# Altium PCB Remote_control_PCB.PcbDoc
Units mm, origin at the board's own origin, x right, y up, seen from the top; angles counter-clockwise.
Board outline 59 x 37 mm, 4 copper layers (Top Layer, GND, +3.3V, Bottom Layer), stack 0.603 mm thick; 50 components, 59 nets, 198 pads, 295 vias.
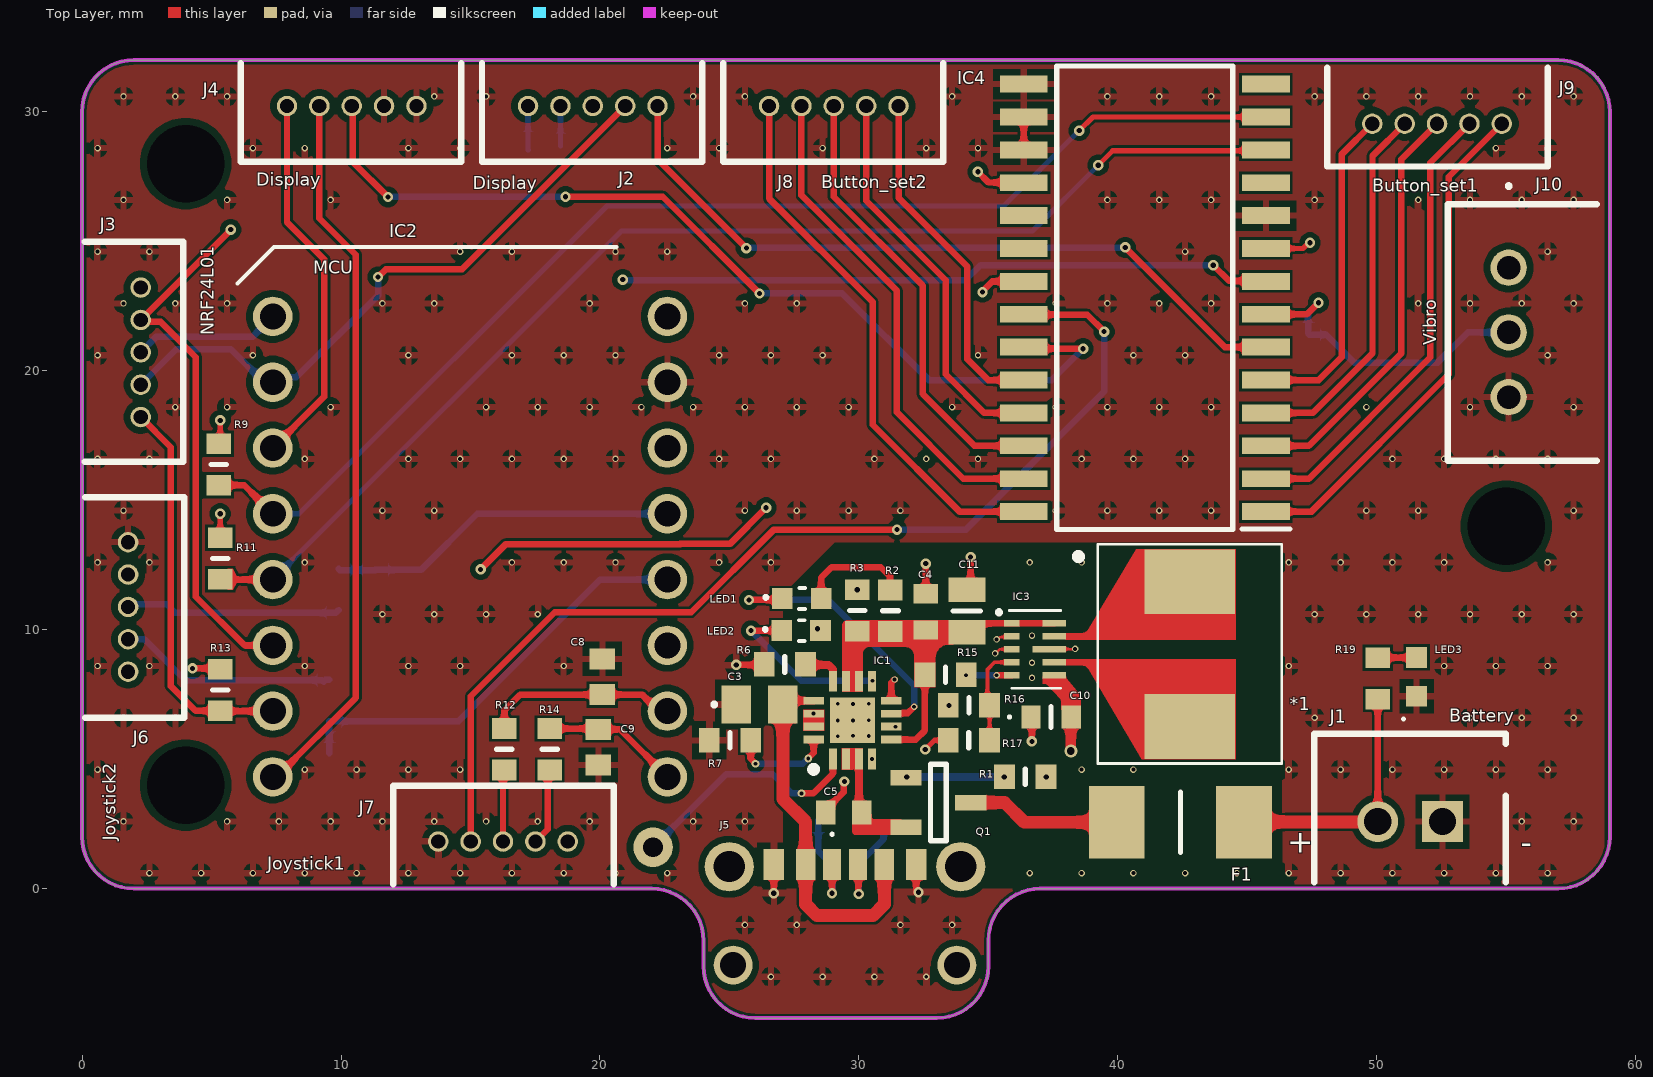
[diagram p0: Top Layer view]
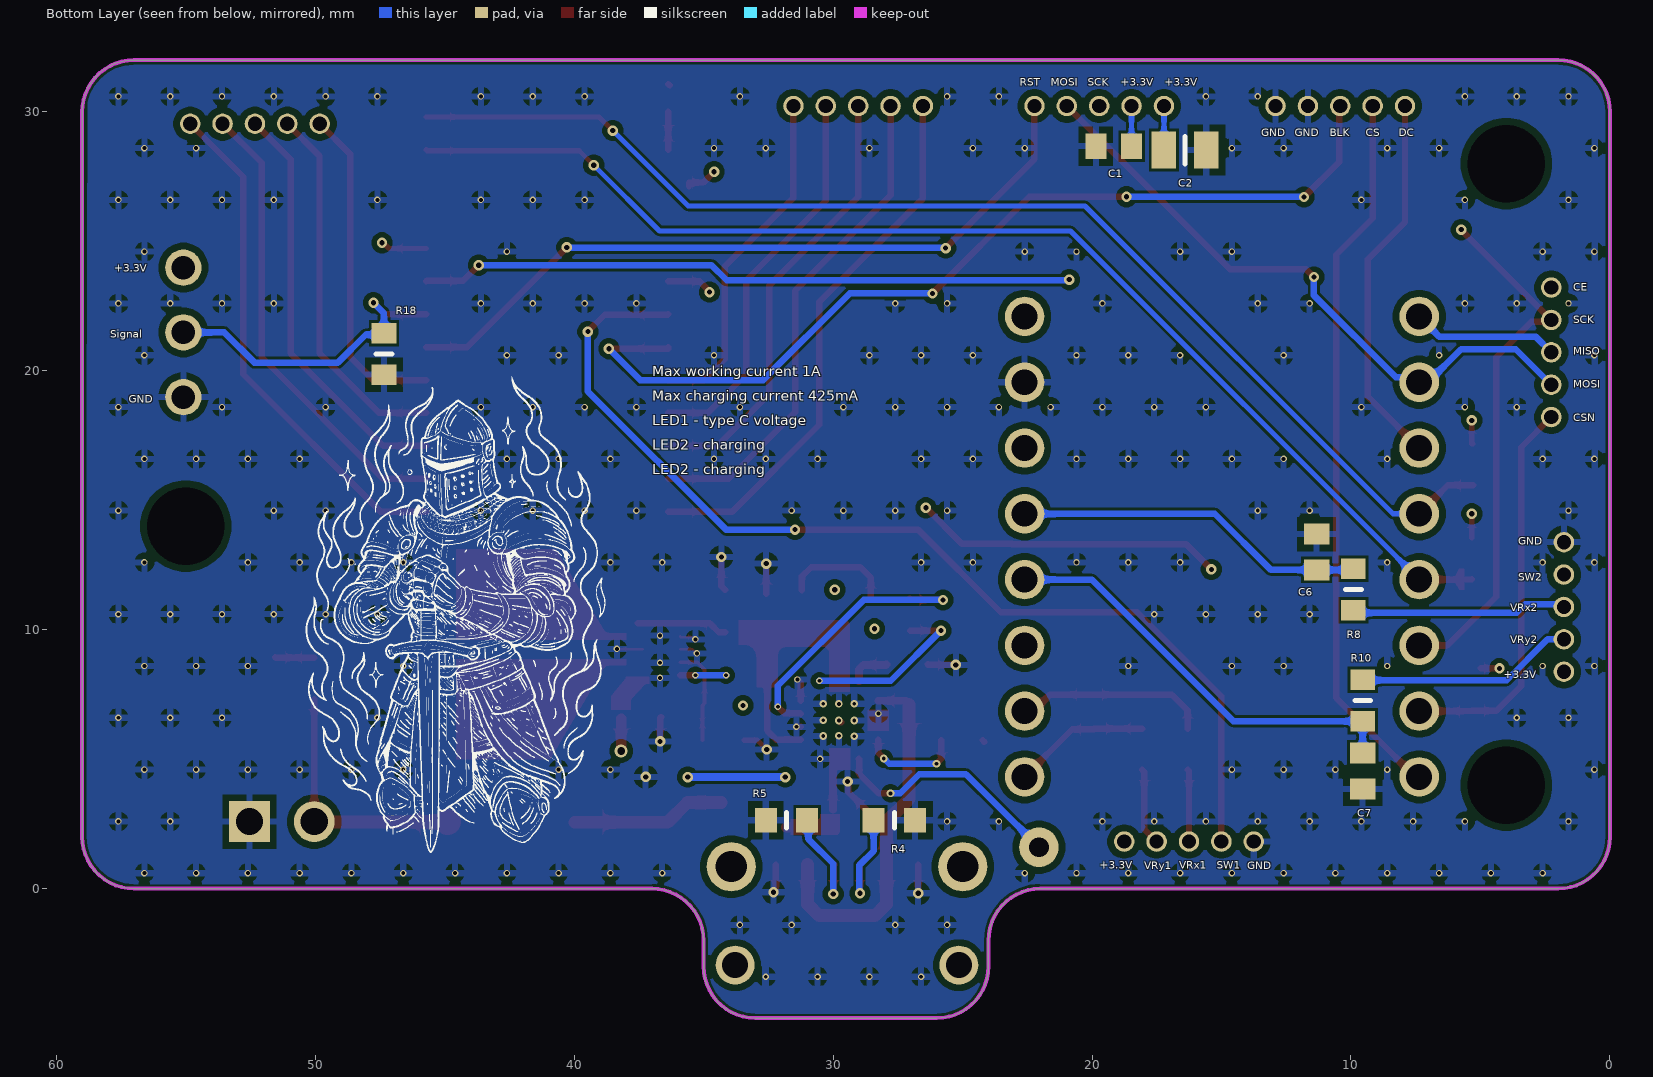
[diagram p1: Bottom Layer view, seen from below]
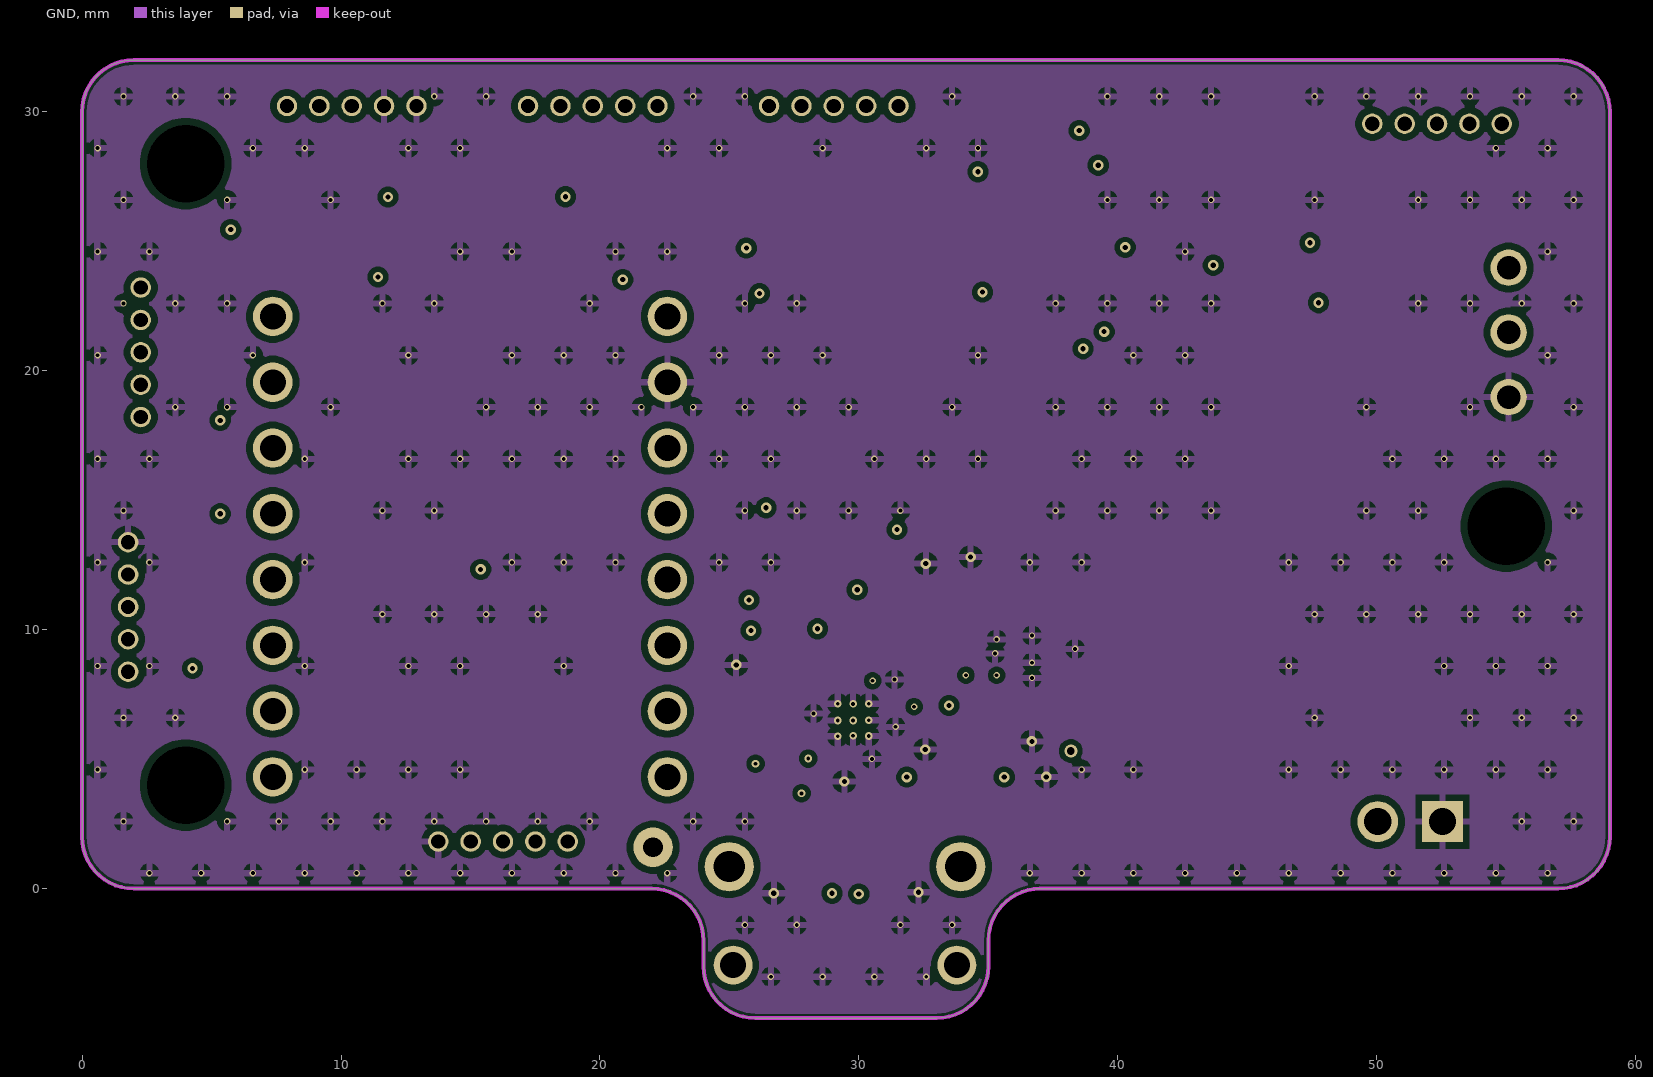
[diagram p2: GND]
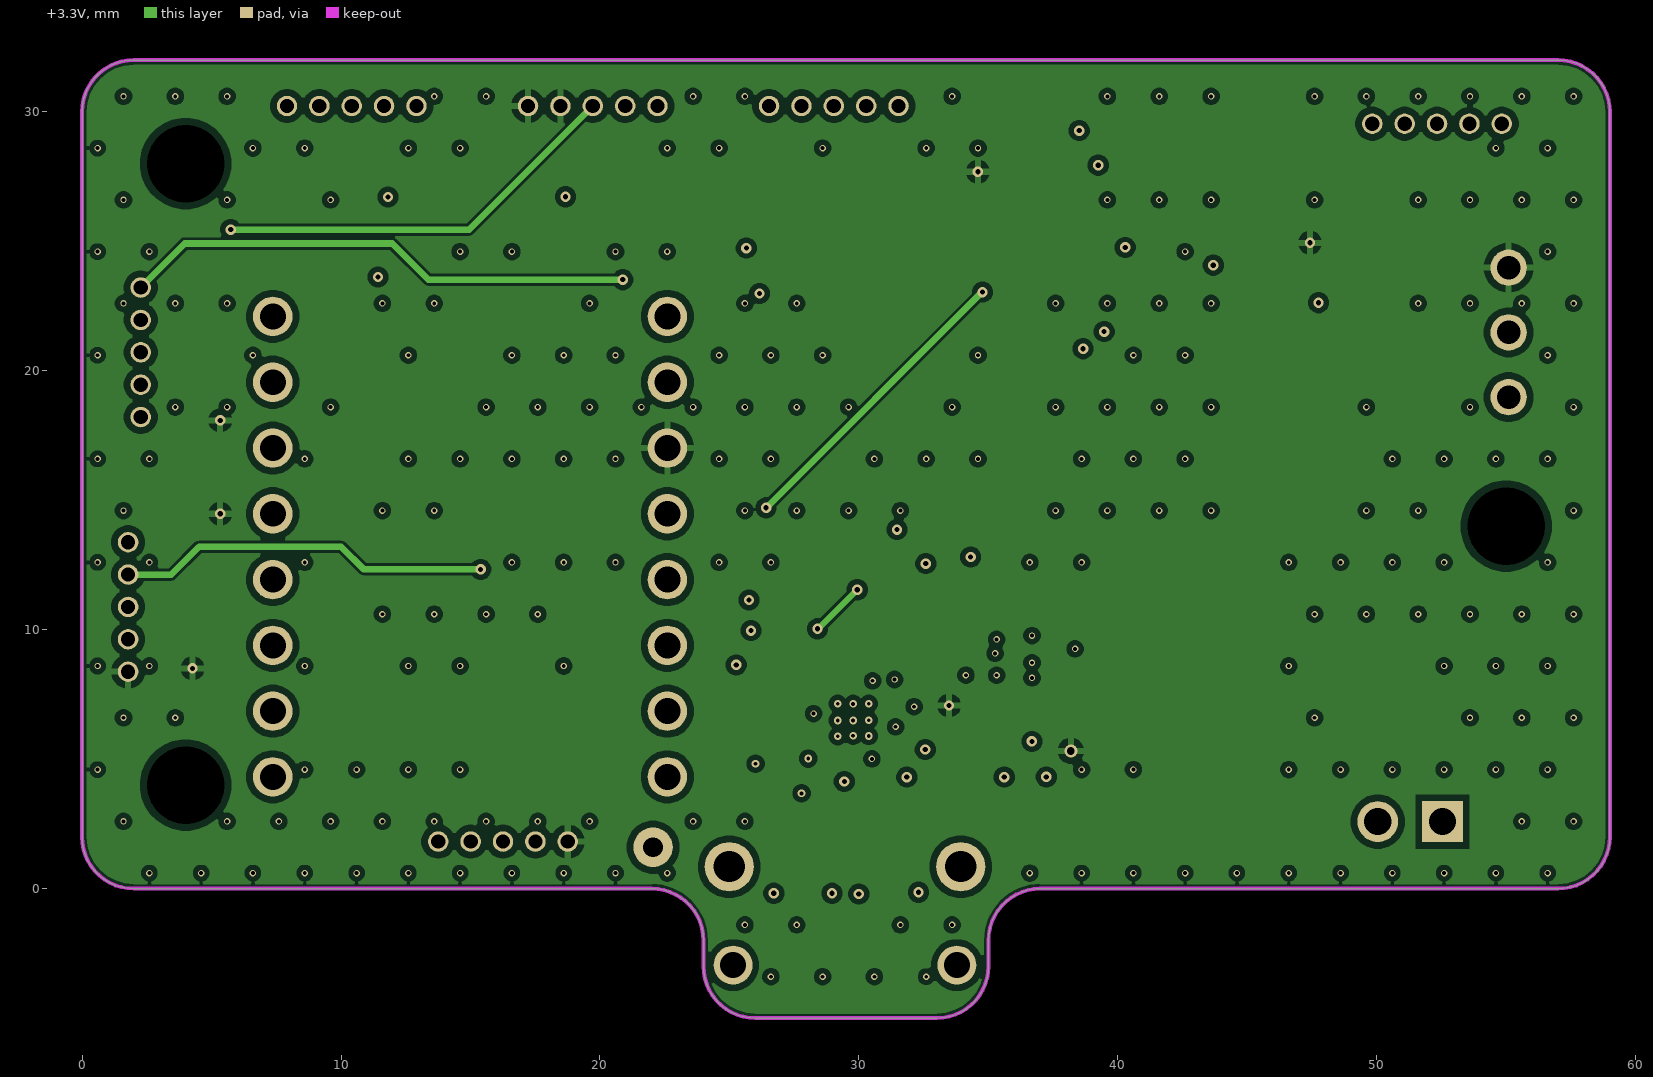
[diagram p3: +3.3V]
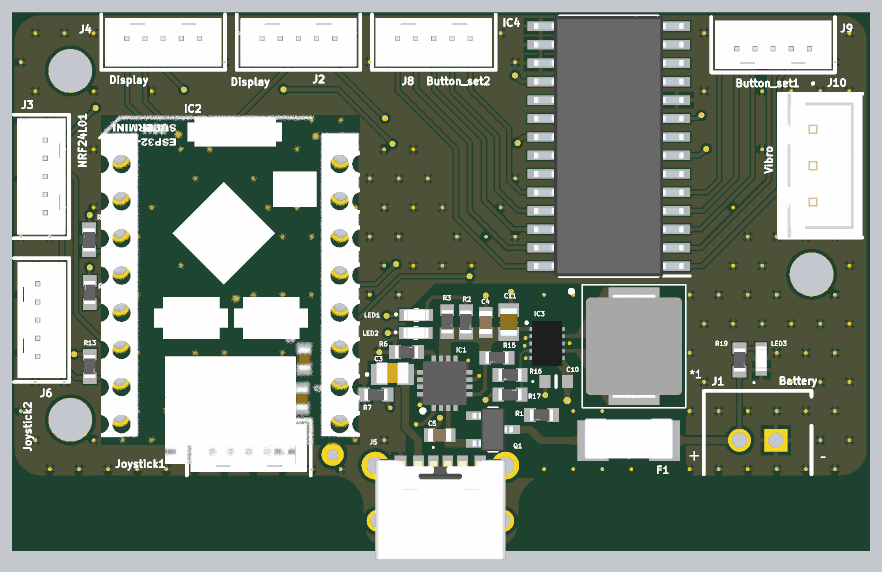
[diagram p4: 3D render of the assembled board from above, using the file's embedded part models]
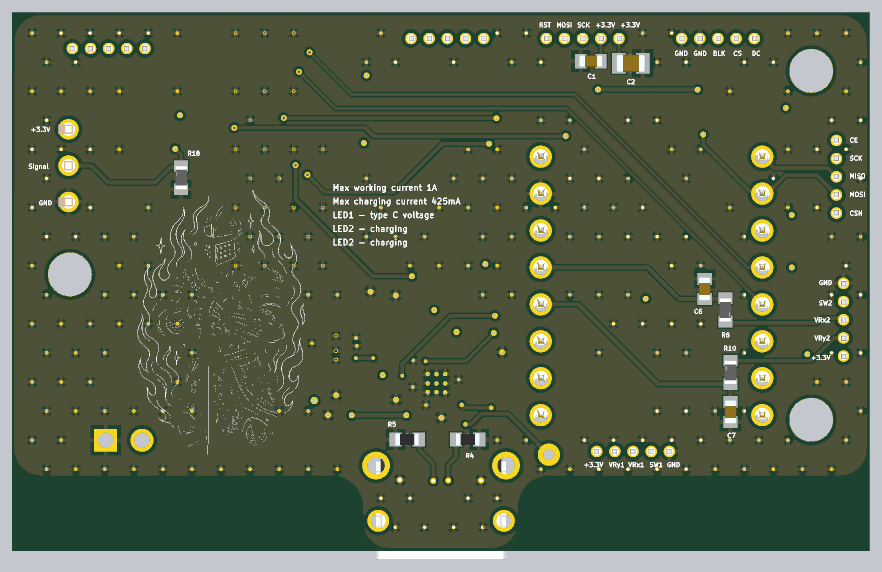
[diagram p5: 3D render of the assembled board from below, using the file's embedded part models]

## Layer stack, top to bottom
Top Solder: solder mask 0.0102, Solder Resist, Dk 3.5
Top Layer: signal copper 0.0356
Dielectric 2: prepreg 0.0711, PP-006, Dk 4.1
GND: signal copper 0.035
Dielectric 1: dielectric 0.32, FR-4, Dk 4.8
+3.3V: signal copper 0.035
Dielectric 3: prepreg 0.0711, PP-006, Dk 4.1
Bottom Layer: signal copper 0.0356
Bottom Solder: solder mask 0.0102, Solder Resist, Dk 3.5

## Board outline
24,-3 24,-2 ccw(c22,-2) 22,0 2,0 cw(c2,2) 0,2 0,30 cw(c2,30) 2,32 57,32 cw(c57,30) 59,30 59.004,29.997 59.004,2.007 59,2 cw(c57,2) 57,0 37,0 ccw(c37,-2) 35,-2 35,-3 cw(c33,-3) 33,-5 26,-5 cw(c26,-3)

## Design rules (kind name [scope] priority, off if disabled: settings)
Clearance "Stitching GND" [IsStitchingVia and InNet('GND') vs (IsVia and (Not IsStitchingVia)) Or IsPad] p1: gap=0.1 ignorepadtopadclearanceinfootprint=TRUE
Clearance "Stitching GND_1" [IsStitchingVia and InNet('GND') vs (IsVia and (Not IsStitchingVia)) Or IsPad] p2: gap=0.25 ignorepadtopadclearanceinfootprint=FALSE
Clearance [All] p3: gap=0.1 ignorepadtopadclearanceinfootprint=FALSE except(0.15: SMDPad-SMDPad; 0.2: Arc-Via Track-Via SMDPad-Hole Via-Via Via-Fill Via-Poly Via-Region; 0.254: Arc-Text Arc-Hole Track-Text Track-Hole SMDPad-Text THPad-Fill THPad-Poly THPad-Region THPad-Text THPad-Hole Via-Text Via-Hole Fill-Text Fill-Hole Poly-Text Poly-Hole Region-Text Region-Hole Text-Text Text-Hole; 0.28: Arc-THPad Track-THPad SMDPad-THPad; 0.3: THPad-Via; 0.45: THPad-THPad)
HoleSize [All] p1: absolutevalues=TRUE maxlimit=6.3 minlimit=0.15 maxpercent=80.000 minpercent=20.000
MinimumSolderMaskSliver [All] p1: minsoldermaskwidth=0.15
PolygonConnect [All] p1: connectstyle=Relief reliefconductorwidth=0.254 reliefentries=4 polygonreliefangle="90 Angle" airgapwidth=0.254
RoutingVias [InNet('GND')] p1: holewidth=0.711 width=1.27 viastyle="Through Hole" minholewidth=0.15 minwidth=0.25 maxholewidth=0.711 maxwidth=1.27
SilkToSilkClearance [All] p1: silktosilkclearance=0.15
SilkToSolderMaskClearance [IsPad] p1: minsilkscreentomaskgap=0.15 clearancetoexposedcopper=TRUE
SolderMaskExpansion [All] p1: expansion=0 istentingtop=FALSE
SupplyNets "Schematic Supply Nets_11" [InNet('GNDC')] p1: voltage=0.000
SupplyNets "Schematic Supply Nets_10" [InNet('VBUS_2')] p2: voltage=0.000
SupplyNets "Schematic Supply Nets_9" [InNet('VBUS_1')] p3: voltage=0.000
SupplyNets "Schematic Supply Nets_8" [InNet('Battery')] p4: voltage=0.000
SupplyNets "Schematic Supply Nets_7" [InNet('VRx2')] p5: voltage=0.000
SupplyNets "Schematic Supply Nets_6" [InNet('VRy2')] p6: voltage=0.000
SupplyNets "Schematic Supply Nets_5" [InNet('VRy1')] p7: voltage=0.000
SupplyNets "Schematic Supply Nets_4" [InNet('VRx1')] p8: voltage=0.000
SupplyNets "Schematic Supply Nets_1" [InNet('GND')] p9: voltage=0.000
SupplyNets "Schematic Supply Nets_3" [InNet('Thermistor')] p10: voltage=0.000
SupplyNets "Schematic Supply Nets_2" [InNet('+5V')] p11: voltage=0.000
SupplyNets "Schematic Supply Nets" [InNet('+3.3V')] p12: voltage=0.000
Width [All] p1: maxlimit=1 minlimit=0.1 preferedwidth=0.25 minimp=50.000000 maximp=50.000000 favimp=50.000000
26 further rules are at their usual default settings.

## Classes and differential pairs
component class U_Power_suply: *1 C10 C11 IC3 l1 R15 R16 R17
component class U_MCU: C6 C7 C8 C9 "ESP C3 SuperMini" IC2 J6 J7 R8 R9 R10 R11 R12 R13 R14
component class U_I2C_buttons: IC4 J8 J9 J10 R18
component class U_Charging: C3 C4 C5 IC1 J5 LED1 LED2 R2 R3 R4 R5 R6 R7
component class Gamepade_blocks: C1 C2 F1 J1 J2 J3 J4 LED3 Q1 R1 R19

## Components (designator, comment, footprint, x,y, rotation, side; value= is the part's Value field where it differs from the comment)
*1 "L" Coil 41.127,5.248 r0 top
C1 "100nF" CAPC1608X95N 19.162,28.676 r180 bottom
C2 "10uF" CAPC2012X140N 16.408,28.524 r0 bottom
C3 "1uF" C0805 26.162,7.112 r0 top
C4 "4.7uF" CAPC1608X90N 32.576,10.691 r270 top
C5 "4.7uF" CAPC1608X90N 29.413,2.94 r0 top
C6 "100nF" CAPC1608X95N 11.328,13.001 r270 bottom
C7 "100nF" CAPC1608X95N 9.55,4.542 r90 bottom
C8 "100nF" CAPC1608X95N 20.091,8.183 r270 top
C9 "100nF" CAPC1608X95N 19.939,5.465 r90 top
C10 "22uF" ZRB18x 37.42,6.63 r0 top
C11 "10uF" CAPC2012X140N 34.167,10.719 r270 top
F1 "1А" FUSC6125X279N 42.418,2.565 r0 top
IC1 "BQ24072RGTR" QFN50P300X300X100-17N-D 29.753,6.509 r90 top
IC2 "ESP C3 SuperMini" "esp c3 super mini" 7.366,4.318 r0 top
IC3 "TPS63802DLAR" TPS63802DLAR 36.8,9.244 r0 top
IC4 "MCP23017-E_SO" SOIC127P1030X265-28N 41.04,22.818 r180 top
J1 "Battery" Conector_2 46.569,-0.743 r0 top
J2 "Display" 1.25_JSH-GH_5 15.445,28.067 r0 top
J3 "NRF24L01" 1.25_JSH-GH_5 0.105,24.992 r270 top
J4 "Display" 1.25_JSH-GH_5 6.136,28.067 r0 top
J5 "USB4125-GF-A-0190" USB4125GFA0190 29.464,-2.15 r0 top
J6 "Joystick2" 1.25_JSH-GH_5 3.937,6.603 r90 top
J7 "Joystick1" 1.25_JSH-GH_5 20.534,3.979 r180 top
J8 "Button_set2" 1.25_JSH-GH_5 24.754,28.067 r0 top
J9 "Button_set1" 1.25_JSH-GH_5 56.605,31.7 r180 top
J10 "Vibro" B3BXHALFSN 55.093,23.983 r270 top
LED1 "LS_L29K-H1J2-1" SMT-0603 27.794,11.207 r0 top
LED2 "LS_L29K-H1J2-1" SMT-0603 27.768,9.967 r0 top
LED3 "LS_L29K-H1J2-1" SMT-0603 51.538,8.182 r90 top
Q1 "AO3401A" SOT95P280X125-3N 33.071,3.327 r0 top
R1 "100kR" RESC1608X55N 36.424,4.318 r180 top
R2 "1.5kR" RESC1608X55N 31.217,10.735 r270 top
R3 "1.5kR" RESC1608X55N 29.936,10.743 r270 top
R4 "5.1kR" RESC1608X60N 27.635,2.642 r0 bottom
R5 "5.1kR" RESC1608X60N 31.8,2.642 r180 bottom
R6 "1.5kR" RESC1608X55N 27.14,8.661 r0 top
R7 "2.1kR" RESC1608X55N 25.021,5.728 r0 top
R8 "1kR" RESC1608X55N 9.906,11.557 r270 bottom
R9 "4.7kR" RESC1608X55N 5.283,16.383 r90 top
R10 "1kR" RESC1608X55N 9.55,7.264 r90 bottom
R11 "4.7kR" RESC1608X55N 5.334,12.751 r90 top
R12 "1kR" RESC1608X55N 16.307,5.385 r270 top
R13 "10kR" RESC1608X55N 5.334,7.671 r270 top value=10kOhm
R14 "1kR" RESC1608X55N 18.059,5.385 r270 top
R15 "100kR" RESC1608X55N 33.351,8.26 r180 top
R16 "511kR" RESC1608X55N 34.247,7.081 r180 top
R17 "91kR" RESC1608X55N 34.246,5.73 r0 top
R18 "10kR" RESC1608X55N 47.346,20.65 r90 bottom value=10kOhm
R19 "1.5kR" RESC1608X55N 50.043,8.119 r270 top

## Footprints (in the part's own frame and the unit in brackets; to place one, negate y for a bottom-side part, rotate by r counter-clockwise, add the part's x,y. Pads: shape width x height; smd on the part's side, far side on the other; paste and mask are expansions set on the pad)
1.25_JSH-GH_5 [mm]
  round 0.79 hole 0.55: 1(1.778,2.159) 2(3.028,2.159) 3(4.278,2.159) 4(5.528,2.159) 5(6.778,2.159)
  silkscreen extent 0,0 8.51,3.81, body extent 0.25,0.24 8.25,3.57, height 4.22
B3BXHALFSN [mm]
  round 1.4 hole 0.9: 1(0,0) 2(2.5,0) 3(5,0)
  silkscreen extent -3.2,-2.35 7.45,3.4, body extent -2.45,-2.35 7.45,3.4, height 7.09
C0805 [mm]
  rect 1.15x1.45 smd: 1(-0.9,0) 2(0.9,0)
  silkscreen extent -1.8,-0.05 -1.7,0.05, body extent -1.1,-0.63 1.1,0.82, height 1
CAPC1608X90N [mm]
  rect 0.75x0.94 smd: 1(-0.7,0) 2(0.7,0)
  body extent -0.8,-0.45 0.8,0.45, height 0.8
CAPC1608X95N [mm]
  rect 0.81x0.99 smd: 1(-0.69,0) 2(0.69,0)
  body extent -0.81,-0.41 0.81,0.41, height 0.95
CAPC2012X140N [mm]
  rect 0.94x1.43 smd: 1(-0.82,0) 2(0.82,0)
  silkscreen extent 0,-0.53 0,0.53, body extent -1,-0.63 1,0.63, height 1.4
Coil [mm]
  rect 3.5x2.5 smd: 1(1.651,6.604) 2(1.651,1.016)
  silkscreen extent -1.91,-0.41 5.21,8.05, body extent -1.65,0.26 4.95,7.36, height 3
Conector_2 [mm]
  rect 1.575x1.575 hole 1.05: 1(5.969,3.334)
  round 1.575 hole 1.05: 2(3.469,3.334)
  silkscreen extent 1.02,0.98 8.42,6.73
"esp c3 super mini" [mil]
  round 60 hole 39.37: 0(0,700) 1(0,600) 2(0,500) 3(0,400) 4(0,300) 5(0,200) 6(0,100) 7(0,0) 8(600,700) 9(600,600) 10(600,500) 11(600,400) 12(600,300) 13(600,200) 14(600,100) 15(600,0)
  body extent -50,-132 652,812, height 524
FUSC6125X279N [mm]
  rect 2.15x2.8 smd: 1(-2.455,0) 2(2.455,0)
  silkscreen extent 0,-1.17 0,1.17, body extent -3.05,-1.27 3.05,1.52, height 2.27
QFN50P300X300X100-17N-D [mm]
  rect 0.8x0.3 smd: 1(-1.5,0.75) 2(-1.5,0.25) 3(-1.5,-0.25) 4(-1.5,-0.75) 9(1.5,-0.75) 10(1.5,-0.25) 11(1.5,0.25) 12(1.5,0.75)
  rect 0.3x0.8 smd: 5(-0.75,-1.5) 6(-0.25,-1.5) 7(0.25,-1.5) 8(0.75,-1.5) 13(0.75,1.5) 14(0.25,1.5) 15(-0.25,1.5) 16(-0.75,1.5)
  rect 1.75x1.75 smd: 17(0,0)
  silkscreen extent -2.02,1.37 -1.78,1.62, body extent -1.5,-1.5 1.5,1.5, height 1
RESC1608X55N [mm]
  rect 0.8x0.95 smd: 1(-0.8,0) 2(0.8,0)
  silkscreen extent 0,-0.3 0,0.3, body extent -0.8,-0.4 0.8,0.4, height 0.55
RESC1608X60N [mm]
  rect 0.85x0.95 smd: 1(-0.8,0) 2(0.8,0)
  silkscreen extent 0,-0.3 0,0.3, body extent -0.8,-0.4 0.8,0.4, height 0.6
SMT-0603 [mm]
  rect 0.8x0.8 smd: 1(-0.75,0) 2(0.75,0)
  silkscreen extent -1.42,-0.4 0.13,0.4, body extent -0.84,-0.4 0.86,0.4, height 0.67
SOIC127P1030X265-28N [mm]
  rect 1.85x0.65 smd: 1(-4.675,8.255) 2(-4.675,6.985) 3(-4.675,5.715) 4(-4.675,4.445) 5(-4.675,3.175) 6(-4.675,1.905) 7(-4.675,0.635) 8(-4.675,-0.635) 9(-4.675,-1.905) 10(-4.675,-3.175) 11(-4.675,-4.445) 12(-4.675,-5.715) 13(-4.675,-6.985) 14(-4.675,-8.255) 15(4.675,-8.255) 16(4.675,-6.985) 17(4.675,-5.715) 18(4.675,-4.445) 19(4.675,-3.175) 20(4.675,-1.905) 21(4.675,-0.635) 22(4.675,0.635) 23(4.675,1.905) 24(4.675,3.175) 25(4.675,4.445) 26(4.675,5.715) 27(4.675,6.985) 28(4.675,8.255)
  silkscreen extent -5.6,-8.95 3.4,8.95, body extent -5.15,-8.95 5.15,8.95, height 2.65
SOT95P280X125-3N [mm]
  rect 1.2x0.6 smd: 1(-1.25,0.95) 2(-1.25,-0.95) 3(1.25,0)
  silkscreen extent -0.3,-1.48 0.3,1.48, body extent -1.4,-1.48 1.4,1.48, height 1.25
TPS63802DLAR [mm]
  rect 0.6x0.25 smd: 1(-0.9,1) 2(-0.9,0.5) 3(-0.9,0) 4(-0.9,-0.5) 5(-0.9,-1)
  rect 0.9x0.25 smd: 6(0.75,-1) 7(0.75,-0.5) 9(0.75,0.5) 10(0.75,1)
  rect 1.3x0.25 smd: 8(0.55,0)
  silkscreen extent -1.44,-1.5 1,1.5, body extent -1.05,-1.55 1.05,1.55, height 1
USB4125GFA0190 [mm]
  rect 0.7x1.2 smd: A5(-0.5,3.08) B5(0.5,3.08)
  rect 0.76x1.2 smd: A9(1.52,3.08) B9(-1.52,3.08)
  rect 0.8x1.2 smd: A12(2.75,3.08) B12(-2.75,3.08)
  round 1.9 hole 1.2: MH1(-4.47,3) MH4(4.47,3)
  round 1.5 hole 1: MH2(-4.32,-0.8) MH3(4.32,-0.8)
  silkscreen extent -0.55,4.2 -0.45,4.3, body extent -4.47,-3.45 4.47,3.45, height 3.26
ZRB18x [mm]
  rect 0.75x0.9 smd: 1(-0.775,0) 2(0.775,0)
  silkscreen extent -1.65,-0.4 0,0.4

## Part data
C1 C6 C7 C8 C9: library part 0603B104K500CT, "Capacitor", Manufacturer_Name="Walsin Technology Corporation", Mouser Part Number=791-0603B104K500CT, Arrow Part Number=0603B104K500CT, Arrow Price/Stock=https://www.arrow.com/en/products/0603b104k500ct/walsin-technology, Datasheet Link=https://datasheet.datasheetarchive.com/originals/distributors/DKDS41/DSANUWW0027552.pdf, Height=0.95mm, Manufacturer_Part_Number=0603B104K500CT, Mouser Price/Stock=https://www.mouser.co.uk/ProductDetail/Walsin/0603B104K500CT?qs=fIkAfuXiAQLxgNQoxkAdgw%3D%3D
C2 C11: library part CL21B106KPQNNNG, "Capacitor", Manufacturer_Name=SAMSUNG, Mouser Part Number=187-CL21B106KPQNNNG, Arrow Part Number=CL21B106KPQNNNG, Arrow Price/Stock=https://www.arrow.com/en/products/cl21b106kpqnnng/samsung-electro-mechanics?utm_currency=USD&region=nac, Datasheet Link=https://datasheet.datasheetarchive.com/originals/distributors/Datasheets-DGA8/2485630.pdf, Height=1.4mm, Manufacturer_Part_Number=CL21B106KPQNNNG, Mouser Price/Stock=https://www.mouser.co.uk/ProductDetail/Samsung-Electro-Mechanics/CL21B106KPQNNNG?qs=yOVawPpwOwmi1gAJqK4H6Q%3D%3D
C3: "Capacitor", Arrow Part Number=C0805C105K5RACTU, Manufacturer_Name="Yageo Group", Mouser Part Number=80-C0805C105K5R, Arrow Price/Stock=https://www.arrow.com/en/products/c0805c105k5ractu/kemet-corporation?region=nac, Datasheet Link=https://www.yageogroup.com/content/datasheet/asset/file/KEM_C1002_X7R_SMD, Height=1.1mm, Manufacturer_Part_Number=C0805C105K5RACTU, Mouser Price/Stock=https://www.mouser.co.uk/ProductDetail/KEMET/C0805C105K5RACTU?qs=iP0bYSAMAFrBrUflcErrLQ%3D%3D
C4 C5: library part CL10A475KP8NNNC, "Capacitor", Manufacturer_Name=SAMSUNG, Mouser Part Number=187-CL10A475KP8NNNC, Arrow Part Number=CL10A475KP8NNNC, Arrow Price/Stock=https://www.arrow.com/en/products/cl10a475kp8nnnc/samsung-electro-mechanics?utm_currency=USD&region=nac, Datasheet Link=https://www.arrow.com/en/products/cl10a475kp8nnnc/samsung-electro-mechanics, Height=0.9mm, Manufacturer_Part_Number=CL10A475KP8NNNC, Mouser Price/Stock=https://www.mouser.co.uk/ProductDetail/Samsung-Electro-Mechanics/CL10A475KP8NNNC?qs=hqM3L16%252BxlfQRmkWsZz5vA%3D%3D
C10: library part ZRB18AR61A226ME01L, "Capacitor", Manufacturer_Name="Murata Electronics", Mouser Part Number=81-ZRB18AR61A226ME1L, Arrow Part Number=ZRB18AR61A226ME01L, Arrow Price/Stock=https://www.arrow.com/en/products/zrb18ar61a226me01l/murata-manufacturing?region=nac, Datasheet Link=https://search.murata.co.jp/Ceramy/image/img/A01X/G101/ENG/ZRB18AR61A226ME01-03A.pdf, Height=1.2mm, Manufacturer_Part_Number=ZRB18AR61A226ME01L, Mouser Price/Stock=https://www.mouser.co.uk/ProductDetail/Murata-Electronics/ZRB18AR61A226ME01L?qs=5aG0NVq1C4zcCU98as8CPQ%3D%3D
F1: library part 0679L2000-01, "Fuse", Manufacturer_Name=BelFuse, Mouser Part Number=530-0679L2000-01, Datasheet Link=https://componentsearchengine.com/Datasheets/1/0679L2000-01.pdf, Height=2.79mm, Manufacturer_Part_Number=0679L2000-01, Mouser Price/Stock=https://www.mouser.co.uk/ProductDetail/Bel-Fuse/0679L2000-01?qs=ZqXcJfGlKsicXrgxMSU%252B%2Fw%3D%3D
IC1: "Integrated Circuit", Manufacturer_Name="Texas Instruments", Mouser Part Number=595-BQ24072RGTR, Arrow Part Number=BQ24072RGTR, Arrow Price/Stock=https://www.arrow.com/en/products/bq24072rgtr/texas-instruments.html?utm_currency=USD&region=nac, Datasheet Link=http://www.ti.com/lit/gpn/BQ24072, Height=1mm, Manufacturer_Part_Number=BQ24072RGTR, Mouser Price/Stock=https://www.mouser.co.uk/ProductDetail/Texas-Instruments/BQ24072RGTR?qs=ZV%2Fxhq4oszo4knrw3goPOA%3D%3D
IC2: library part IC
IC3: "Integrated Circuit", Manufacturer_Name="Texas Instruments", Mouser Part Number=595-TPS63802DLAR, Arrow Part Number=TPS63802DLAR, Arrow Price/Stock=https://www.arrow.com/en/products/tps63802dlar/texas-instruments?utm_currency=USD&region=nac, Datasheet Link=http://www.ti.com/lit/ds/symlink/tps63802.pdf, Height=1mm, Manufacturer_Part_Number=TPS63802DLAR, Mouser Price/Stock=https://www.mouser.co.uk/ProductDetail/Texas-Instruments/TPS63802DLAR?qs=9r4v7xj2Lnmr2ylyTiX9Mg%3D%3D
IC4: "Integrated Circuit", Arrow Part Number=MCP23017-E/SO, Manufacturer_Name=Microchip, Mouser Part Number=579-MCP23017-E/SO, Arrow Price/Stock=https://www.arrow.com/en/products/mcp23017-eso/microchip-technology.html?utm_currency=USD&region=europe, Datasheet Link=https://datasheet.datasheetarchive.com/originals/distributors/SFDatasheet-4/sf-00090057.pdf, Height=2.65mm, Manufacturer_Part_Number=MCP23017-E/SO, Mouser Price/Stock=https://www.mouser.co.uk/ProductDetail/Microchip-Technology/MCP23017-E-SO?qs=usxtMOJb1Rz8hft7vV7YMQ%3D%3D
J1: library part B2B-XH-AM_LF__SN_, "Connector", Arrow Part Number=B2B-XH-AM(LF)(SN), Manufacturer_Name="JST (JAPAN SOLDERLESS TERMINALS)", Mouser Part Number=306-B2B-XH-AMLFSNP, Arrow Price/Stock=https://www.arrow.com/en/products/b2b-xh-am-lf-sn/jst-manufacturing?utm_currency=USD&region=europe, Datasheet Link=https://www.jst-mfg.com/product/pdf/eng/eXH.pdf, Height=7mm, Manufacturer_Part_Number=B2B-XH-AM(LF)(SN), Mouser Price/Stock=https://www.mouser.co.uk/ProductDetail/JST-Commercial/B2B-XH-AMLFSN?qs=cdbOS8ANM9BJgHgwB7WxQw%3D%3D
J2 J3 J4 J6 J7 J8 J9: library part B5B-XH-AM__LF__SN_, "Connector", Arrow Part Number="B5B-XH-AM (LF)(SN)", Manufacturer_Name="JST (JAPAN SOLDERLESS TERMINALS)", Arrow Price/Stock=https://www.arrow.com/en/products/b5b-xh-am-lf-sn/jst-manufacturing, Datasheet Link=http://uk.rs-online.com/web/p/products/1755317, Height=7mm, Manufacturer_Part_Number="B5B-XH-AM (LF)(SN)"
J5: "Connector", Manufacturer_Name="GCT (GLOBAL CONNECTOR TECHNOLOGY)", Mouser Part Number=640-USB4125-GF-A-190, Datasheet Link=https://eu.mouser.com/datasheet/2/837/usb4125-2448699.pdf, Manufacturer_Part_Number=USB4125-GF-A-0190, Mouser Price/Stock=https://www.mouser.co.uk/ProductDetail/GCT/USB4125-GF-A-0190?qs=QNEnbhJQKvbCz4hEJBS24w%3D%3D
J10: library part B3B-XH-A_LF__SN_, "Connector", Arrow Part Number=B3B-XH-A(LF)(SN), Manufacturer_Name="JST (JAPAN SOLDERLESS TERMINALS)", Mouser Part Number=306-B3BXHALFSNP, Arrow Price/Stock=https://www.arrow.com/en/products/b3b-xh-a-lf-sn/jst-manufacturing.html?utm_currency=USD&region=europe, Datasheet Link=https://datasheet.lcsc.com/szlcsc/1812131720_JST-Sales-America-B3B-XH-A-LF-SN_C144394.pdf, Height=7mm, Manufacturer_Part_Number=B3B-XH-A(LF)(SN), Mouser Price/Stock=https://www.mouser.co.uk/ProductDetail/JST-Commercial/B3B-XH-ALFSN?qs=cdbOS8ANM9BVkoboCCIEMQ%3D%3D
LED1 LED2 LED3: "LED", Manufacturer_Name="ams OSRAM", Manufacturer_Part_Number="LS L29K-H1J2-1", Mouser Part Number=720-LSL29K-H1J2-1-Z, Mouser Price/Stock=https://www.mouser.com/Search/Refine.aspx?Keyword=720-LSL29K-H1J2-1-Z
Q1: "MOSFET (P-Channel)", Manufacturer_Name="Alpha & Omega Semiconductors", Arrow Part Number=AO3401A, Arrow Price/Stock=https://www.arrow.com/en/products/ao3401a/alpha-and-omega-semiconductor.html?utm_currency=USD&region=europe, Datasheet Link=http://www.aosmd.com/pdfs/datasheet/AO3401A.pdf, Height=1.25mm, Manufacturer_Part_Number=AO3401A
R1 R15: library part RC0603FR-07100KL, "Resistor", Manufacturer_Name=YAGEO, Mouser Part Number=603-RC0603FR-07100KL, Arrow Part Number=RC0603FR-07100KL, Arrow Price/Stock=https://www.arrow.com/en/products/rc0603fr-07100kl/yageo?utm_currency=USD&region=europe, Datasheet Link=https://www.yageo.com/upload/media/product/productsearch/datasheet/rchip/PYu-RC_Group_51_RoHS_L_12.pdf, Height=0.55mm, Manufacturer_Part_Number=RC0603FR-07100KL, Mouser Price/Stock=https://www.mouser.co.uk/ProductDetail/YAGEO/RC0603FR-07100KL?qs=e1ok2LiJcmaihem8Va5%2Fsw%3D%3D
R2 R3 R6 R19: library part RC0603FR-071K5L, "Resistor", Manufacturer_Name="Yageo Group", Mouser Part Number=603-RC0603FR-071K5L, Arrow Part Number=RC0603FR-071K5L, Arrow Price/Stock=https://www.arrow.com/en/products/rc0603fr-071k5l/yageo?utm_currency=USD&region=europe, Datasheet Link=https://www.yageo.com/upload/media/product/productsearch/datasheet/rchip/PYu-RC_Group_51_RoHS_L_12.pdf, Height=0.55mm, Manufacturer_Part_Number=RC0603FR-071K5L, Mouser Price/Stock=https://www.mouser.co.uk/ProductDetail/YAGEO/RC0603FR-071K5L?qs=VU8sRB4EgwBMt9nc4XGNgA%3D%3D
R4 R5: library part WR06X5101FTL, "Resistor", Manufacturer_Name="Walsin Technology Corporation", Datasheet Link=https://componentsearchengine.com/Datasheets/2/WR06X5101FTL.pdf, Height=0.6mm, Manufacturer_Part_Number=WR06X5101FTL
R7: library part RC0603FR-072K1L, "Resistor", Manufacturer_Name="Yageo Group", Mouser Part Number=603-RC0603FR-072K1L, Arrow Part Number=RC0603FR-072K1L, Arrow Price/Stock=https://www.arrow.com/en/products/rc0603fr-072k1l/yageo?utm_currency=USD&region=nac, Datasheet Link=https://www.yageo.com/upload/media/product/products/datasheet/rchip/PYu-RC_Group_51_RoHS_L_12.pdf, Height=0.55mm, Manufacturer_Part_Number=RC0603FR-072K1L, Mouser Price/Stock=https://www.mouser.co.uk/ProductDetail/YAGEO/RC0603FR-072K1L?qs=IuGqVx9wL0IQ8qvrNmtVmg%3D%3D
R8 R10 R12 R14: library part RC0603FR-071KL, "Resistor", Manufacturer_Name="Yageo Group", Mouser Part Number=603-RC0603FR-071KL, Arrow Part Number=RC0603FR-071KL, Arrow Price/Stock=https://www.arrow.com/en/products/rc0603fr-071kl/yageo?utm_currency=USD&region=europe, Datasheet Link=https://www.yageo.com/upload/media/product/productsearch/datasheet/rchip/PYu-RC_Group_51_RoHS_L_12.pdf, Height=0.55mm, Manufacturer_Part_Number=RC0603FR-071KL, Mouser Price/Stock=https://www.mouser.co.uk/ProductDetail/YAGEO/RC0603FR-071KL?qs=VU8sRB4EgwApHsk4rF%2F3zg%3D%3D
R9 R11: library part RC0603FR-074K75L, "Resistor", Manufacturer_Name="Yageo Group", Mouser Part Number=603-RC0603FR-074K75L, Arrow Part Number=RC0603FR-074K75L, Arrow Price/Stock=https://www.arrow.com/en/products/rc0603fr-074k75l/yageo, Datasheet Link=http://www.yageo.com/documents/recent/PYu-RC0603_51_RoHS_L_v5.pdf, Height=0.55mm, Manufacturer_Part_Number=RC0603FR-074K75L, Mouser Price/Stock=https://www.mouser.co.uk/ProductDetail/Yageo/RC0603FR-074K75L?qs=5Z1f76oN9PMSImX%2FXUaE6Q%3D%3D
R13 R18: library part RC0603FR0710KL, "Resistor", Manufacturer_Name="Yageo Group", Arrow Part Number=RC0603FR0710KL, Arrow Price/Stock=https://www.arrow.com/en/products/rc0603fr-0710kl/yageo, Datasheet Link=http://www.yageo.com/documents/recent/PYu-RC0603_51_RoHS_L_v5.pdf, Height=0.55mm, Manufacturer_Part_Number=RC0603FR0710KL
R16: library part ERJ-3EKF5113V, "Resistor", Manufacturer_Name=Panasonic, Mouser Part Number=667-ERJ-3EKF5113V, Datasheet Link=http://industrial.panasonic.com/cdbs/www-data/pdf/RDA0000/AOA0000C86.pdf, Height=0.55mm, Manufacturer_Part_Number=ERJ-3EKF5113V, Mouser Price/Stock=https://www.mouser.co.uk/ProductDetail/Panasonic/ERJ-3EKF5113V?qs=MVjVSMjNRMp7W4j9eXihvA%3D%3D
R17: library part ERJ-3EKF9102V, "Resistor", Manufacturer_Name=Panasonic, Mouser Part Number=667-ERJ-3EKF9102V, Arrow Part Number=ERJ-3EKF9102V, Arrow Price/Stock=https://www.arrow.com/en/products/erj-3ekf9102v/panasonic?region=nac, Datasheet Link=http://industrial.panasonic.com/cdbs/www-data/pdf/RDA0000/AOA0000C86.pdf, Height=0.55mm, Manufacturer_Part_Number=ERJ-3EKF9102V, Mouser Price/Stock=https://www.mouser.co.uk/ProductDetail/Panasonic/ERJ-3EKF9102V?qs=iBwFsHVUAOc4tH39HZ1qJA%3D%3D

## Free pads (board coordinates)
  round 2 hole 3: 1(4,28) 2(4,4) 3(55,14)
  round 1.524 hole 0.762: 4(22.05,1.6)

## Via types
v1: diameter 0.25, hole 0.15, Top Layer to Bottom Layer, 241 vias
v2: diameter 0.4, hole 0.2, Top Layer to Bottom Layer, 41 vias
v3: diameter 0.3, hole 0.15, Top Layer to Bottom Layer, 12 vias
v4: diameter 0.5, hole 0.3, Top Layer to Bottom Layer, 1 vias

## Nets (pads, with @x,y where several pads share a name; then routed paths per layer and width w, separated by ;. In a path a pad name is that pad's centre, name@x,y a point inside that pad or via, vN(x,y) a via of type N, cw(c..) or ccw(c..) an arc to the next point about the centre after c; other vN are vias at no path point)
1: IC4.1 J9.1 | length 19.8
  Top Layer w0.25: IC4.1 47.482,14.563 52.781,19.863 52.781,27.495 J9.1
2: IC4.2 J9.2 | length 17.9
  Top Layer w0.25: IC4.2 47.38,15.833 52.07,20.523 52.07,28.034 J9.2
3: IC4.3 J9.3 | length 16.2
  Top Layer w0.25: IC4.3 47.38,17.103 50.952,20.676 50.952,28.166 J9.3
4: IC4.4 J9.4 | length 14.5
  Top Layer w0.25: IC4.4 47.533,18.373 49.835,20.676 49.835,28.299 J9.4
5: IC4.5 J9.5 | length 12.8
  Top Layer w0.25: IC4.5 47.761,19.643 48.641,20.523 48.641,28.355 J9.5
6: IC4.28 J8.1 | length 21.2
  Top Layer w0.25: J8.1 26.532,26.655 30.531,22.657 30.531,17.918 33.885,14.563 IC4.28
7: IC4.27 J8.2 | length 19.3
  Top Layer w0.25: J8.2 27.782,26.777 31.471,23.089 31.471,18.395 34.032,15.833 IC4.27
8: IC4.26 J8.3 | length 17.3
  Top Layer w0.25: J8.3 29.032,26.721 32.461,23.292 32.461,19.105 34.463,17.103 IC4.26
9: IC4.25 J8.4 | length 15.3
  Top Layer w0.25: J8.4 30.282,26.563 33.35,23.495 33.35,19.864 34.841,18.373 IC4.25
10: IC4.24 J8.5 | length 13.4
  Top Layer w0.25: J8.5 31.532,26.685 34.188,24.028 34.188,20.455 35,19.643 IC4.24
+3.3V: C1.2 C2.2 C10.2 IC2.10 IC3.6 IC4.9 IC4.18 J2.1 J2.2 J6.1 J7.1 J10.1 R9.2 R11.2 R13.1 R16.2 | length 10.3
  Top Layer w0.2: R9.2 5.334,17.183 v2(5.334,18.085) ; R11.2 v2(5.334,14.478) ; C10.2 C10.2@38.22,6.605 ; IC4.9 47.148,24.723 47.368,24.943 v2(47.422,24.943)
  Top Layer w0.25: v2(4.267,8.509) R13.1@4.984,8.509 ; v2(34.595,27.686) 35.009,27.272 35.565,27.272 IC4.18@35.565,27.129 ; C10.2@38.185,6.57 C10.2@38.22,6.605
  Top Layer w0.4: v4(38.185,5.32) C10.2@38.185,6.57
  Bottom Layer w0.2: J2.1 17.223,28.53 C2.2 ; C1.2 18.473,28.677 J2.2
  other v2: 33.482,7.073
+5V: C3.2 IC1.13 J5.A9 J5.B9 | length 14.3
  Top Layer w0.3: C3.2 27.209,7.259 IC1.13
  Top Layer w0.5: C3.2 27.062,3.462 27.944,2.58 J5.B9 27.944,-0.602 28.383,-1.041 30.545,-1.041 30.984,-0.602 J5.A9
BATT: C5.2 IC1.2 IC1.3 Q1.2 | length 2.4
  Top Layer w0.3: C5.2@30.003,3.05 IC1.3
  Top Layer w0.4: Q1.2@31.421,2.477 31.521,2.377 Q1.2
Battery: F1.2 J1.2 R19.2 | length 9.9
  Top Layer w0.25: J1.2 50.038,7.315 R19.2
  Top Layer w0.5: F1.2@44.886,2.578 J1.2@50.025,2.578
  Top Layer w1: F1.2 F1.2@44.886,2.578
BLK: IC4.23 J4.3 | length 36.7
  Top Layer w0.25: J4.3 10.447,30.193 10.447,28.079 v2(11.816,26.71) ; v2(18.669,26.721) 22.428,26.721 v2(26.162,22.987) ; IC4.23 36.365,20.853 v2(38.659,20.853)
  Bottom Layer w0.25: v2(11.816,26.71) 11.821,26.715 18.664,26.715 v2(18.669,26.721) ; v2(26.162,22.987) 29.362,22.987 32.706,19.643 37.449,19.643 v2(38.659,20.853)
CC1: J5.A5 R4.2 | length 4.2
  Top Layer w0.25: v2(28.964,-0.178) J5.A5
  Bottom Layer w0.25: R4.2 28.435,1.458 28.981,0.912 28.981,-0.16 v2(28.964,-0.178)
CC2: J5.B5 R5.2 | length 4.1
  Top Layer w0.25: J5.B5 29.981,0.913 29.981,-0.186 v2(29.997,-0.203)
  Bottom Layer w0.25: v2(29.997,-0.203) 29.997,0.963 30.956,1.922 R5.2@30.956,2.398
CE: IC4.8 J3.1 | length 45.2
  Top Layer w0.25: v2(43.688,24.079) 44.298,23.47 45.699,23.47 IC4.8
  +3.3V w0.254: J3.1 3.965,24.915 11.977,24.915 13.372,23.52 v2(20.879,23.52)
  Bottom Layer w0.25: v2(20.879,23.52) 20.904,23.495 34.112,23.495 34.696,24.079 v2(43.688,24.079)
CHG: IC1.9 LED2.1 | length 6.7
  Top Layer w0.25: v2(25.832,9.967) LED2.1
  Bottom Layer w0.25: v2(25.832,9.967) 27.77,8.029 v1(30.532,8.029)
CS: IC2.7 J4.2 | length 27.9
  Top Layer w0.25: IC2.7 7.518,4.318 10.566,7.366 10.566,24.486 9.164,25.888 J4.2
CSN: IC2.6 J3.5 R13.2 | length 15.5
  Top Layer w0.25: J3.5 3.429,17.05 3.429,7.823 4.381,6.871 R13.2 5.684,6.858 IC2.6
  Bottom Layer w0.25: IC2.6@7.021,6.858 IC2.6
DC: IC2.2 J4.1 | length 14.6
  Top Layer w0.25: IC2.2 9.347,18.999 9.347,24.308 7.914,25.741 J4.1
FB: IC3.4 R16.1 R17.2 | length 3.8
  Top Layer w0.15: R17.2 R16.1 34.963,7.165 34.963,8.465 35.243,8.744 IC3.4
GND: C1.1 C2.1 C3.1 C4.1 C5.1 C6.1 C7.1 C8.1 C9.1 C10.1 C11.1 IC1.4 IC1.6 IC1.8 IC1.14 IC1.15 IC1.17 IC2.9 IC3.2 IC3.3 IC3.8 IC4.10 IC4.15 IC4.16 IC4.17 J1.1 J4.4 J4.5 J5.A12 J5.B12 J6.5 J7.5 J10.3 LED3.1 R1.1 R4.1 R5.1 R6.1 R7.1 R17.1 R18.1 | length 14.5
  Top Layer w0.1: v1(35.258,9.085) 35.287,9.085 35.45,9.248 35.897,9.248 IC3.3 ; v1(35.316,9.624) 35.357,9.624 35.45,9.717 35.873,9.717 IC3.2 ; IC3.8 37.358,9.252 38.343,9.252 v1(38.35,9.26)
  Top Layer w0.2: v2(32.564,5.372) 32.922,5.73 R17.1
  Top Layer w0.25: R7.1@24.157,5.664 R7.1 ; v2(25.262,8.642) 26.321,8.642 R6.1 ; v2(26.714,-0.178) J5.B12 ; C5.1 28.713,3.035 29.41,3.731 29.41,4.112 v2(29.439,4.14) ; IC1.17@29.691,6.429 29.712,6.429 v3(29.78,6.497) ; IC1.6 31.256,6.256 31.411,6.256 v1(31.416,6.251) ; IC1.8 31.253,7.952 v1(31.379,8.078) ; J5.A12 32.214,-0.137 v2(32.301,-0.137) ; C4.1 32.584,11.399 v2(32.584,12.555) ; C11.1 34.316,11.688 v2(34.316,12.81) ; IC4.15@36.311,31.019 IC4.15 ; IC4.17 36.366,28.733 36.366,29.603 36.373,29.807 IC4.16@36.376,30.003 ; C10.1 36.681,6.594 v2(36.681,5.689)
  other v1: 26.6,-3.4 28.6,-3.4 30.6,-3.4 32.6,-3.4 25.6,-1.4 27.6,-1.4 31.6,-1.4 33.6,-1.4 2.6,0.6 4.6,0.6 6.6,0.6 8.6,0.6 10.6,0.6 12.6,0.6 14.6,0.6 16.6,0.6 18.6,0.6 20.6,0.6 22.6,0.6 36.6,0.6 38.6,0.6 40.6,0.6 42.6,0.6 44.6,0.6 46.6,0.6 48.6,0.6 50.6,0.6 52.6,0.6 54.6,0.6 56.6,0.6 1.6,2.6 5.6,2.6 7.6,2.6 9.6,2.6 11.6,2.6 13.6,2.6 15.6,2.6 17.6,2.6 19.6,2.6 23.6,2.6 25.6,2.6 55.6,2.6 57.6,2.6 0.6,4.6 8.6,4.6 10.6,4.6 12.6,4.6 14.6,4.6 38.6,4.6 40.6,4.6 46.6,4.6 48.6,4.6 50.6,4.6 52.6,4.6 54.6,4.6 56.6,4.6 30.499,5.01 1.6,6.6 3.6,6.6 47.6,6.6 53.6,6.6 55.6,6.6 57.6,6.6 28.253,6.759 36.686,8.142 0.6,8.6 2.6,8.6 8.6,8.6 12.6,8.6 14.6,8.6 18.6,8.6 46.6,8.6 52.6,8.6 54.6,8.6 56.6,8.6 36.686,8.725 36.686,9.774 11.6,10.6 13.6,10.6 15.6,10.6 17.6,10.6 47.6,10.6 49.6,10.6 51.6,10.6 53.6,10.6 55.6,10.6 57.6,10.6 0.6,12.6 2.6,12.6 8.6,12.6 16.6,12.6 18.6,12.6 20.6,12.6 24.6,12.6 26.6,12.6 36.6,12.6 38.6,12.6 46.6,12.6 48.6,12.6 50.6,12.6 52.6,12.6 56.6,12.6 1.6,14.6 11.6,14.6 13.6,14.6 25.6,14.6 27.6,14.6 29.6,14.6 31.6,14.6 37.6,14.6 39.6,14.6 41.6,14.6 43.6,14.6 49.6,14.6 51.6,14.6 57.6,14.6 0.6,16.6 2.6,16.6 8.6,16.6 12.6,16.6 14.6,16.6 16.6,16.6 18.6,16.6 20.6,16.6 24.6,16.6 26.6,16.6 30.6,16.6 32.6,16.6 34.6,16.6 38.6,16.6 40.6,16.6 42.6,16.6 50.6,16.6 52.6,16.6 54.6,16.6 56.6,16.6 3.6,18.6 5.6,18.6 9.6,18.6 15.6,18.6 17.6,18.6 19.6,18.6 21.6,18.6 23.6,18.6 25.6,18.6 27.6,18.6 29.6,18.6 33.6,18.6 37.6,18.6 39.6,18.6 41.6,18.6 43.6,18.6 49.6,18.6 53.6,18.6 57.6,18.6 0.6,20.6 6.6,20.6 12.6,20.6 16.6,20.6 18.6,20.6 20.6,20.6 24.6,20.6 26.6,20.6 28.6,20.6 34.6,20.6 40.6,20.6 42.6,20.6 56.6,20.6 1.6,22.6 3.6,22.6 5.6,22.6 11.6,22.6 13.6,22.6 19.6,22.6 25.6,22.6 27.6,22.6 37.6,22.6 39.6,22.6 41.6,22.6 43.6,22.6 51.6,22.6 53.6,22.6 55.6,22.6 57.6,22.6 0.6,24.6 2.6,24.6 14.6,24.6 16.6,24.6 20.6,24.6 22.6,24.6 42.6,24.6 56.6,24.6 1.6,26.6 5.6,26.6 9.6,26.6 39.6,26.6 41.6,26.6 43.6,26.6 47.6,26.6 51.6,26.6 53.6,26.6 55.6,26.6 57.6,26.6 0.6,28.6 6.6,28.6 8.6,28.6 12.6,28.6 14.6,28.6 22.6,28.6 24.6,28.6 28.6,28.6 32.6,28.6 34.6,28.6 54.6,28.6 56.6,28.6 1.6,30.6 3.6,30.6 5.6,30.6 13.6,30.6 15.6,30.6 23.6,30.6 25.6,30.6 33.6,30.6 39.6,30.6 41.6,30.6 43.6,30.6 47.6,30.6 49.6,30.6 51.6,30.6 53.6,30.6 55.6,30.6 57.6,30.6
  other v2: 37.237,4.318
  other v3: 29.185,5.888 29.78,5.905 30.38,5.9 29.185,6.496 30.38,6.504 29.185,7.143 29.78,7.139 30.38,7.141
GNDC: 
ILIM: IC1.12 R6.2 | length 1.6
  Top Layer w0.3: R6.2 27.959,8.642 28.078,8.642 28.827,8.642 29.003,8.466 IC1.12
ISET: IC1.16 R7.2 | length 3.9
  Top Layer w0.25: R7.2 25.821,5.015 v3(26.01,4.826) ; v3(28.045,5.025) 28.045,5.038 28.253,5.246 IC1.16
  Bottom Layer w0.25: v3(26.01,4.826) 27.833,4.826 v3@28.032,5.025
L1: *1.1 IC3.9
L2: *1.2 IC3.7
MISO: IC2.0 J3.3 | length 5.8
  Top Layer w0.25: J3.3 J3.3@2.368,20.818
  Bottom Layer w0.25: J3.3 2.874,21.324 6.592,21.324 IC2.0
MOSI: IC2.1 J2.4 J3.4 | length 24.8
  Top Layer w0.25: IC2.1@7.272,19.464 IC2.1 ; v2(11.43,23.622) 11.735,23.927 14.674,23.927 J2.4
  Bottom Layer w0.25: J3.4 3.632,20.832 5.747,20.832 7.021,19.558 IC2.1 7.564,19.756 8.276,19.756 11.43,22.911 v2(11.43,23.622)
NetC6_2: C6.2 IC2.11 R8.1 | length 13.6
  Bottom Layer w0.25: R8.1 9.957,12.306 11.324,12.306 C6.2 13.089,12.311 15.257,14.478 IC2.11
NetC7_2: C7.2 IC2.12 R10.1 | length 16.6
  Bottom Layer w0.254: C7.2 R10.1 14.542,6.464 20.015,11.938 IC2.12
NetC8_2: C8.2 IC2.14 R12.1 | length 7.5
  Top Layer w0.25: R12.1 16.307,6.883 16.916,7.493 C8.2 21.633,7.493 22.268,6.858 IC2.14
NetC9_2: C9.2 IC2.15 R14.1 | length 5.3
  Top Layer w0.25: R14.1 19.909,6.185 C9.2 20.769,6.155 IC2.15
NetF1_1: F1.1 Q1.3 | length 6
  Top Layer w0.5: Q1.3 35.624,3.327 36.386,2.565 F1.1
NetJ11_A5: 
NetJ11_B5: 
NetLED1_2: LED1.2 R2.1 | length 4.3
  Top Layer w0.25: LED1.2 28.544,12.016 28.945,12.417 30.848,12.417 31.203,12.062 31.203,11.538 R2.1@31.217,11.523
NetLED2_2: LED2.2 R3.1 | length 2.2
  +3.3V w0.25: v2(28.402,10.036) 28.429,10.036 v2(29.936,11.543)
NetLED3_2: LED3.2 R19.1 | length 1.5
  Top Layer w0.25: R19.1 51.525,8.919 LED3.2
NetQ1_1: Q1.1 R1.2 | length 3.8
  Top Layer w0.3: Q1.1 v2(31.852,4.308) ; v2(35.614,4.308) R1.2
  Bottom Layer w0.3: v2(31.852,4.308) v2(35.614,4.308)
OUT: C4.2 C11.2 IC1.5 IC1.10 IC1.11 IC3.1 IC3.10 R2.2 R3.2 R15.2 | length 7.1
  Top Layer w0.25: IC1.5 32.2,5.759 32.551,6.109 R15.2 ; C11.2 34.412,9.899 34.757,10.244 IC3.10
PG: IC3.5 R15.1 | length 1.8
  Top Layer w0.25: v1(35.321,8.243) 35.322,8.244 IC3.5
  Bottom Layer w0.25: v1@34.135,8.243 v1(35.321,8.243)
  other v1: 34.134,8.244
PGOOD: IC1.7 LED1.1 | length 10.9
  Top Layer w0.25: v2(25.756,11.151) 27.044,11.151 LED1.1 ; IC1.7 31.278,6.784 31.891,6.784 v1(32.134,7.027)
  Bottom Layer w0.25: v2(25.756,11.151) 28.822,11.151 32.134,7.839 v1(32.134,7.027)
RST: IC4.6 J2.5 | length 28.6
  Top Layer w0.25: J2.5 22.223,28.17 v2(25.654,24.74) ; v2(40.284,24.765) 44.136,20.913 IC4.6
  Bottom Layer w0.25: v2(25.654,24.74) 25.667,24.752 40.272,24.752 v2(40.284,24.765)
SCK: IC2.5 J2.3 J3.2 | length 36.6
  Top Layer w0.25: J3.2 2.341,21.887 3.034,21.887 4.394,20.527 4.394,11.278 6.274,9.398 IC2.5
  Top Layer w0.254: J3.2 5.74,25.44 v2(5.74,25.451)
  +3.3V w0.254: v2(5.74,25.451) 14.948,25.451 J2.3
SCL: IC2.4 IC4.12 R11.1 | length 47.3
  Top Layer w0.2: v2(39.243,27.94) 39.802,28.499 45.681,28.499 IC4.12
  Top Layer w0.25: R11.1 5.684,11.938 IC2.4
  Bottom Layer w0.2: IC2.4 20.828,25.4 36.703,25.4 v2(39.243,27.94)
SDA: IC2.3 IC4.13 R9.1 | length 47.2
  Top Layer w0.2: v2(38.507,29.275) 39.036,29.803 IC4.13
  Top Layer w0.25: R9.1 6.261,15.583 IC2.3
  Bottom Layer w0.2: IC2.3 8.382,14.478 20.269,26.365 35.598,26.365 v2(38.507,29.275)
SW1: IC4.22 J7.4 | length 40.6
  Top Layer w0.25: J7.4 15.006,7.431 18.25,10.675 23.527,10.675 26.721,13.868 v2(31.471,13.868) ; IC4.22 36.383,22.166 38.819,22.166 v2(39.472,21.514)
  Bottom Layer w0.25: v2(31.471,13.868) 34.137,13.868 39.472,19.202 v2(39.472,21.514)
SW2: IC4.21 J6.4 | length 40
  Top Layer w0.254: v2(15.392,12.33) 16.371,13.309 23.09,13.309 23.097,13.316 25.022,13.316 v2(26.416,14.709) ; v2(34.773,23.038) 34.773,23.074 35.152,23.453 IC4.21
  +3.3V w0.254: J6.4 3.444,12.131 4.521,13.208 10.005,13.208 10.882,12.33 v2(15.392,12.33) ; v2(26.416,14.709) 26.43,14.709 34.758,23.038 v2(34.773,23.038)
Thermistor: IC1.1 pad.4 | length 9.3
  Top Layer w0.25: v3(27.788,3.683) 28.245,3.683 28.992,4.43 28.992,4.998 IC1.1
  Bottom Layer w0.25: pad.4 24.87,4.42 26.67,4.42 27.407,3.683 v3(27.788,3.683)
VBUS_1: 
VBUS_2: 
Vibro_S: IC4.7 J10.2 R18.2 | length 12.3
  Top Layer w0.25: IC4.7 47.304,22.183 v2(47.752,22.631)
  Bottom Layer w0.25: v2(47.752,22.631) 47.346,22.225 R18.2 47.401,21.394 48.049,21.394 49.124,20.32 52.349,20.32 53.512,21.483 J10.2
VRx1: J7.3 R12.2 | length 2.8
  Top Layer w0.25: J7.3 16.256,4.534 R12.2
VRx2: J6.3 R8.2 | length 8.4
  Bottom Layer w0.254: J6.3 1.881,10.983 3.266,10.983 3.597,10.652 9.801,10.652 R8.2
VRy1: J7.2 R14.2 | length 3
  Top Layer w0.25: J7.2 17.984,2.298 17.984,4.51 R14.2
VRy2: J6.2 R10.2 | length 8.5
  Bottom Layer w0.254: J6.2 2.409,9.631 3.988,8.052 9.264,8.052 9.326,7.99 9.401,8.064 R10.2
pads on no net: IC2.8 IC2.13 IC4.11 IC4.14 IC4.19 IC4.20 J5.MH1 J5.MH2 J5.MH3 J5.MH4

## Polygon pours and split planes (outlines as drawn)
GND on Bottom Layer "NONET_L01_P-001" (solid, pour order 5): 0,32.004 0,0 22.098,0 cw(c22.098,-1.905) 24.003,-1.905 24.003,-3.048 ccw(c25.908,-3.048) 25.908,-4.953 33.02,-4.953 ccw(c33.02,-2.921) 35.052,-2.921 35.052,-1.905 cw(c36.957,-1.905) 36.957,0 56.896,0 ccw(c56.896,2.159) 58.904,1.365 58.773,32.004
GND on GND "NONET_L01_P-001" (solid, pour order 6): 0,32.004 0,0 22.225,0 cw(c22.225,-1.778) 24.003,-1.778 24.003,-3.175 ccw(c25.908,-3.175) 25.908,-5.08 32.893,-5.08 ccw(c32.893,-2.921) 35.052,-2.921 35.052,-2.032 cw(c37.084,-2.032) 37.084,0 57.023,0 ccw(c57.023,2.032) 59.055,2.032 59.055,32.004
+3.3V on +3.3V "NONET_L01_P-001" (solid, pour order 7): 0,32.004 0,0 21.808,0 cw(c21.808,-2.54) 23.604,-0.744 23.622,-0.762 cw(c22.702,-1.682) 24.003,-1.682 24.003,-3.302 ccw(c25.229,-3.302) 24.362,-4.169 24.511,-4.318 ccw(c26.044,-2.785) 26.044,-4.953 33.147,-4.953 ccw(c33.147,-3.048) 35.052,-3.048 35.052,-1.524 cw(c36.576,-1.524) 36.576,0 59.055,0 59.055,32.004
GND on Top Layer "NONET_L01_P-001" (solid, pour order 10): -0.051,32.029 -0.051,0.025 21.975,0.025 cw(c21.975,-2.011) 24.011,-2.011 24.011,-5 35,-5 35,-2 cw(c37.152,-2) 37.152,0.152 58.776,0.152 58.776,32.029

## Keep-outs
Keep-Out Layer:
  lines w0.15: 59,2 cw(c57,2) 57,0 37,0 ccw(c37,-2) 35,-2 35,-3 cw(c33,-3) 33,-5 26,-5 cw(c26,-3) 24,-3 24,-2 ccw(c22,-2) 22,0 2,0 cw(c2,2) 0,2 0,30 cw(c2,30) 2,32 57,32 cw(c57,30) 59,30 ; 59.004,2.007 59.004,17.831 ; 59.004,17.856 59.004,23.292 ; 59.004,23.308 59.004,29.997

## Other copper
Top Layer:
  region net L1: 37.986,9.871 38.602,9.871 ccw(c38.602,10.193) 38.879,10.029 40.702,13.1 44.552,13.1 44.552,9.621 37.986,9.621
  region net L2: 37.986,8.62 38.622,8.62 cw(c38.622,8.332) 38.869,8.479 40.932,5.004 44.552,5.004 44.552,8.87 37.986,8.87
  region net BATT: 31.633,2.677 31.633,2.076 29.88,2.076 cw(c29.88,2.217) 29.74,2.217 29.74,2.677 29.74,2.871 30.488,2.871 30.488,2.799 ccw(c30.61,2.799) 30.61,2.677
  region net +3.3V: 37.819,6.907 37.819,7.192 ccw(c37.62,7.192) 37.768,7.326 37.275,7.873 ccw(c37.191,7.796) 37.191,7.91 37.101,7.91 37.101,8.129 37.101,8.176 37.999,8.176 37.999,8.159 ccw(c38.089,8.159) 38.02,8.101 38.509,7.522 cw(c38.311,7.355) 38.571,7.355 38.571,7.073 38.571,6.907
  region net OUT: 30.153,9.089 30.153,8.482 29.353,8.482 29.353,10.152 cw(c29.561,10.161) 29.571,10.369 33.653,10.369 33.653,9.43 33.48,9.43 ccw(c33.48,8.906) 32.956,8.905 32.956,7.784 32.142,7.784 32.142,9.036 ccw(c31.777,8.967) 31.777,9.339 30.406,9.339 ccw(c30.403,9.089)
  region net BATT: 29.344,5.415 30.153,5.415 30.153,4.483 29.852,4.483 29.852,4.518 ccw(c29.771,4.518) 29.771,4.6 29.344,4.6
  region net GND: 27.85,6.91 28.653,6.91 28.653,6.107 27.85,6.107
  pour cut-out: 29.066,13.382 39.221,13.382 46.35,13.382 46.35,11.699 46.35,4.071 46.38,0 27.062,0 27.062,11.378
  region net SCL: 5.98,11.813 5.811,11.55 5.625,11.55 5.625,12.349 5.813,12.349 5.981,12.061 5.978,11.811
  region net OUT: 29.353,7.609 29.353,8.561 30.154,8.561 30.154,7.609

## Silkscreen, mask and mechanical layers (free items; w line width, h text height)
Top Overlay:
  lines w0.15: 7.411,24.782 5.998,23.369 ; 7.414,24.78 20.632,24.78 20.642,24.77 ; 5.998,23.369 5.998,23.369
  lines w0.254: 38.571,12.917 ccw(c38.481,12.827) 38.595,12.884
  text "MCU" at 8.932,23.74 h0.5
  text "+" at 46.537,1.09 h1.52
  text "-" at 55.557,1.068 h1.52
Bottom Overlay:
  drawing of 1504 lines, arcs and shapes, not listed
  text "+3.3V" at 17.197,31.012 h0.3
  text "+3.3V" at 18.899,31.012 h0.3
  text "SCK" at 20.169,31.012 h0.3
  text "MOSI" at 21.592,31.012 h0.3
  text "RST" at 22.785,31.012 h0.3
  text "DC" at 8.155,29.056 h0.3
  text "CS" at 9.425,29.056 h0.3
  text "BLK" at 10.822,29.056 h0.3
  text "GND" at 12.168,29.056 h0.3
  text "GND" at 13.464,29.056 h0.3
  text "+3.3V" at 57.761,23.824 h0.3
  text "CE" at 1.424,23.087 h0.3
  text "SCK" at 1.424,21.842 h0.3
  text "Signal" at 57.914,21.282 h0.3
  text "MISO" at 1.424,20.623 h0.3
  text "Max working current 1A" at 36.976,19.781 h0.4
  text "MOSI" at 1.424,19.353 h0.3
  text "Max charging current 425mA" at 36.976,18.839 h0.4
  text "GND" at 57.202,18.769 h0.3
  text "CSN" at 1.424,18.058 h0.3
  text "LED1 - type C voltage" at 36.976,17.897 h0.4
  text "LED2 - charging" at 36.976,16.954 h0.4
  text "LED2 - charging" at 36.976,16.012 h0.4
  text "GND" at 3.541,13.283 h0.3
  text "SW2" at 3.541,11.886 h0.3
  text "VRx2" at 3.841,10.717 h0.3
  text "VRy2" at 3.841,9.471 h0.3
  text "+3.3V" at 4.091,8.126 h0.3
  text "GND" at 13.997,0.759 h0.3
  text "SW1" at 15.191,0.76 h0.3
  text "VRx1" at 16.639,0.76 h0.3
  text "VRy1" at 17.985,0.759 h0.3
  text "+3.3V" at 19.712,0.76 h0.3